# Altium PCB PCB2.PcbDoc
Units mm, origin at the board's own origin, x right, y up, seen from the top; angles counter-clockwise.
Board outline 51.21 x 49.89 mm, 2 copper layers (Top Layer, Bottom Layer); 29 components, 18 nets, 96 pads, 5 vias.
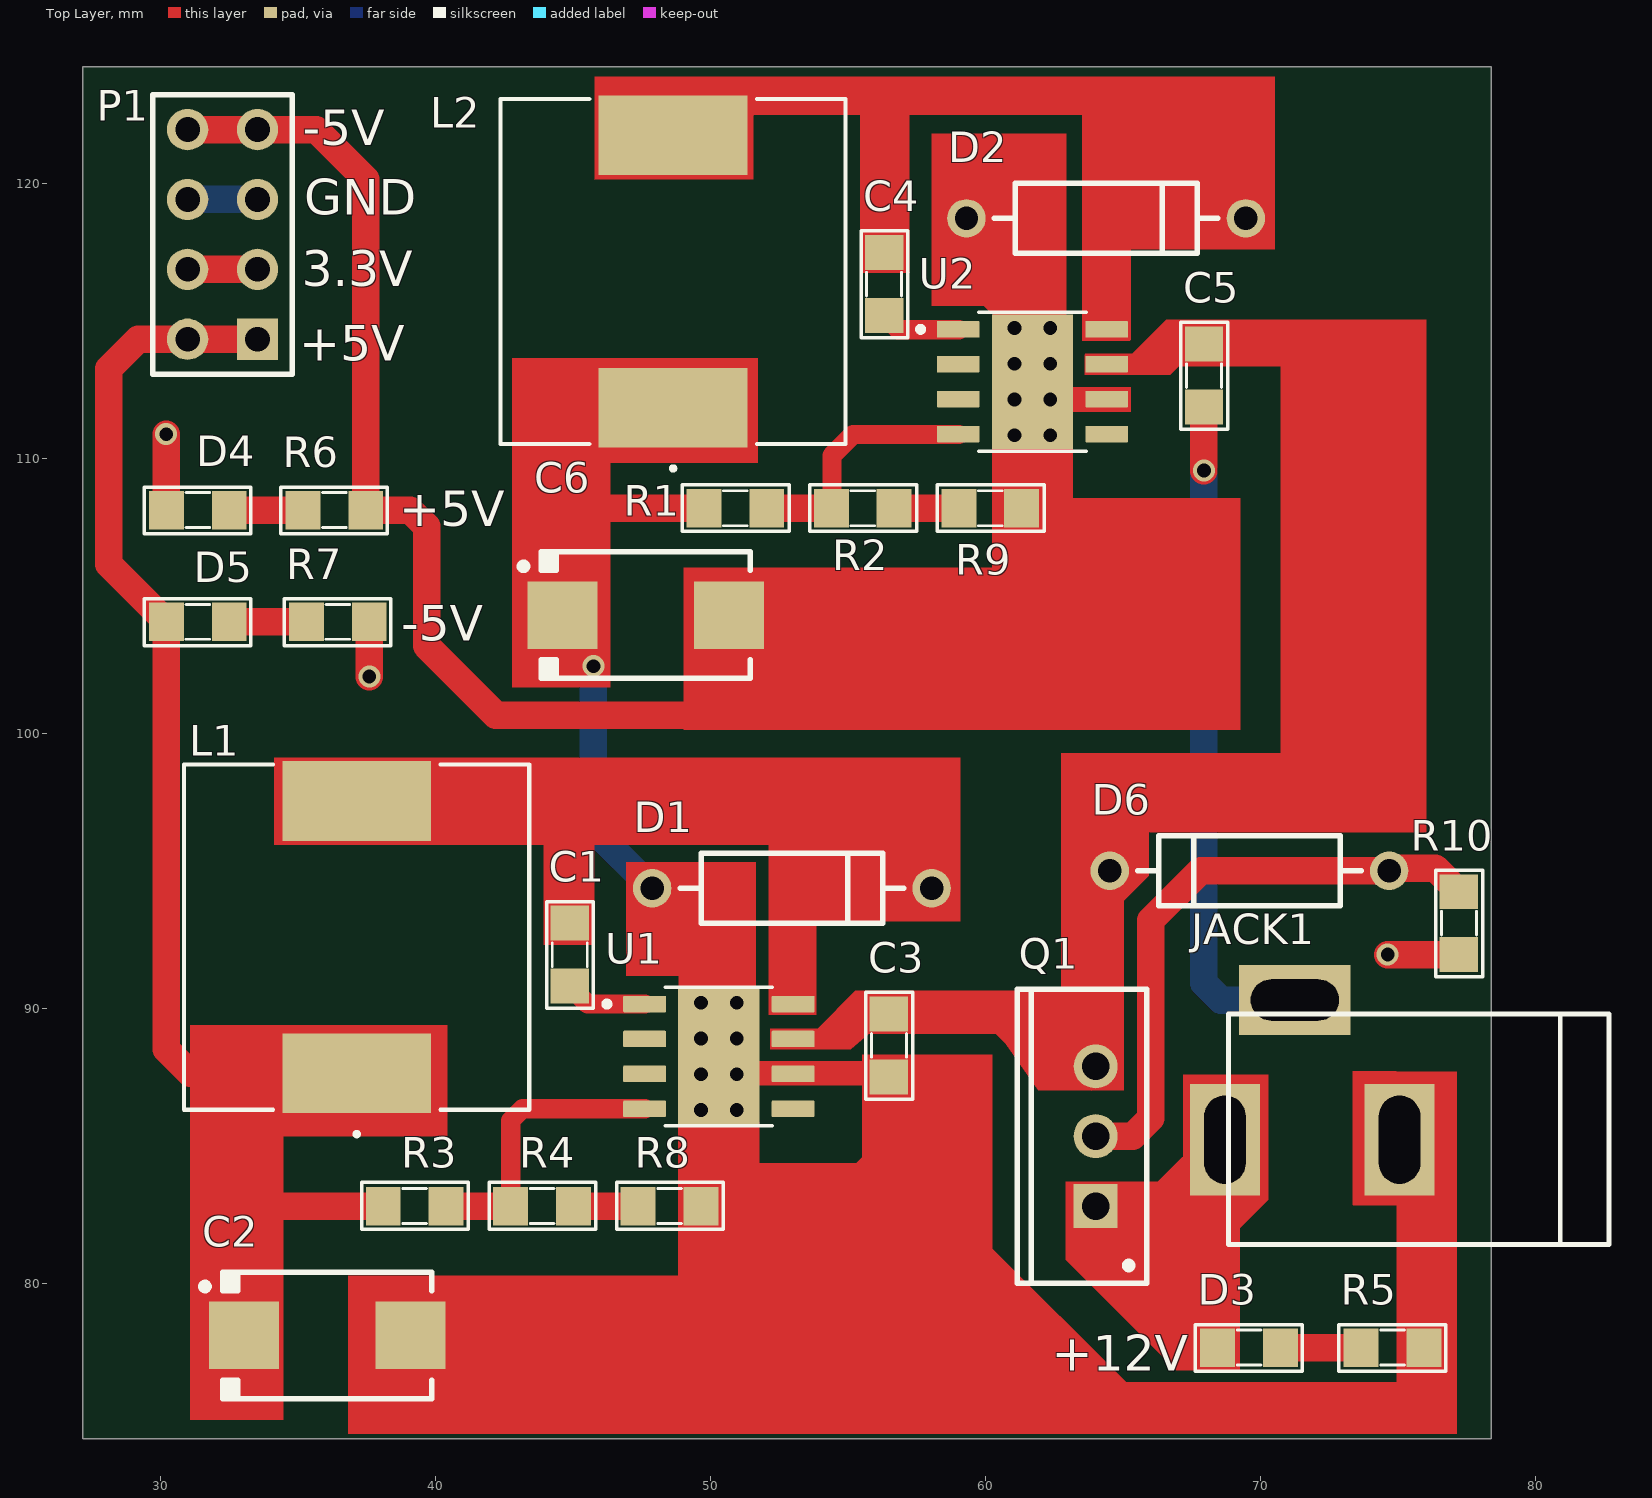
[diagram p0: Top Layer view]
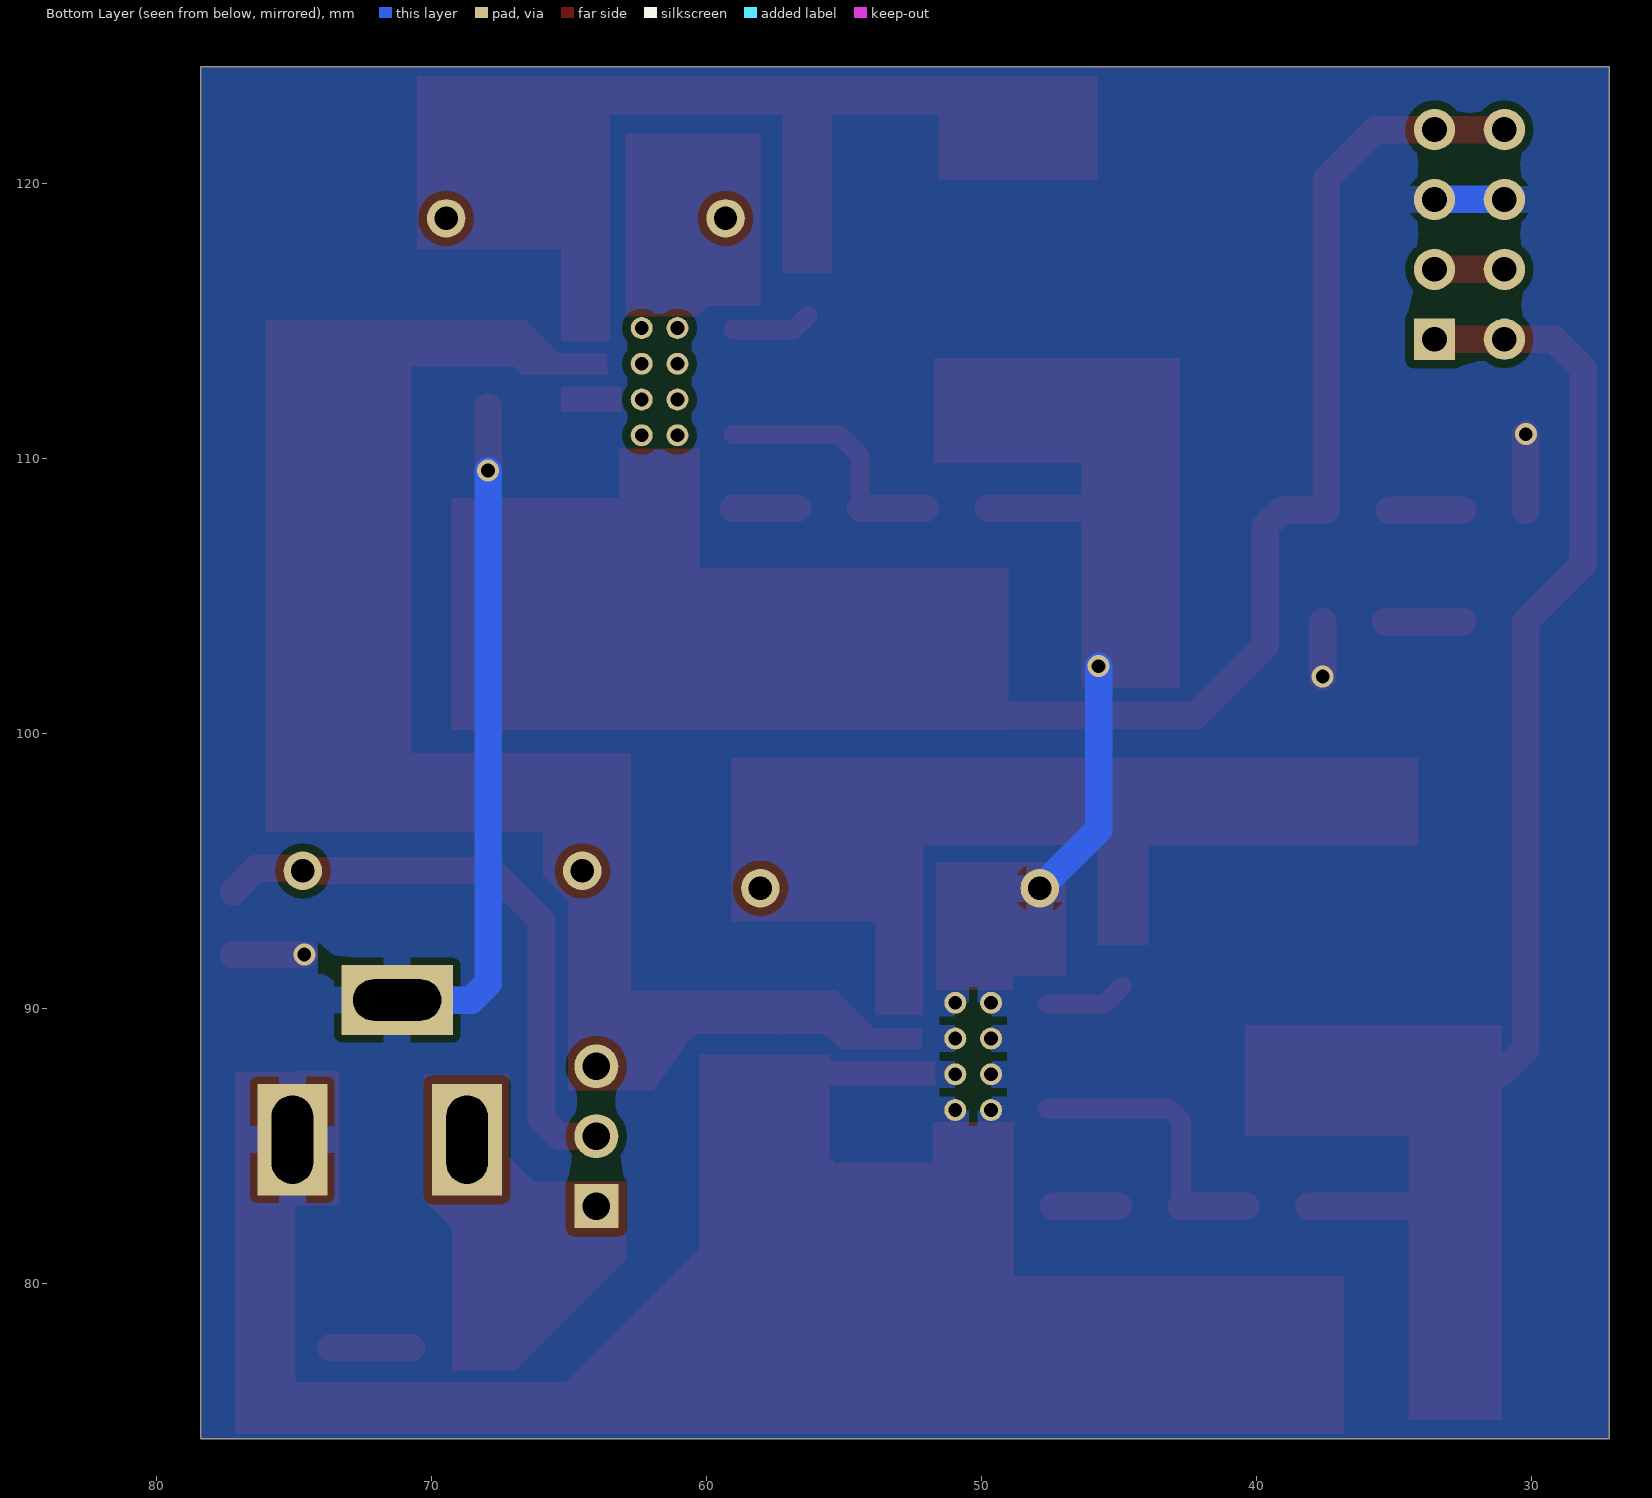
[diagram p1: Bottom Layer view, seen from below]
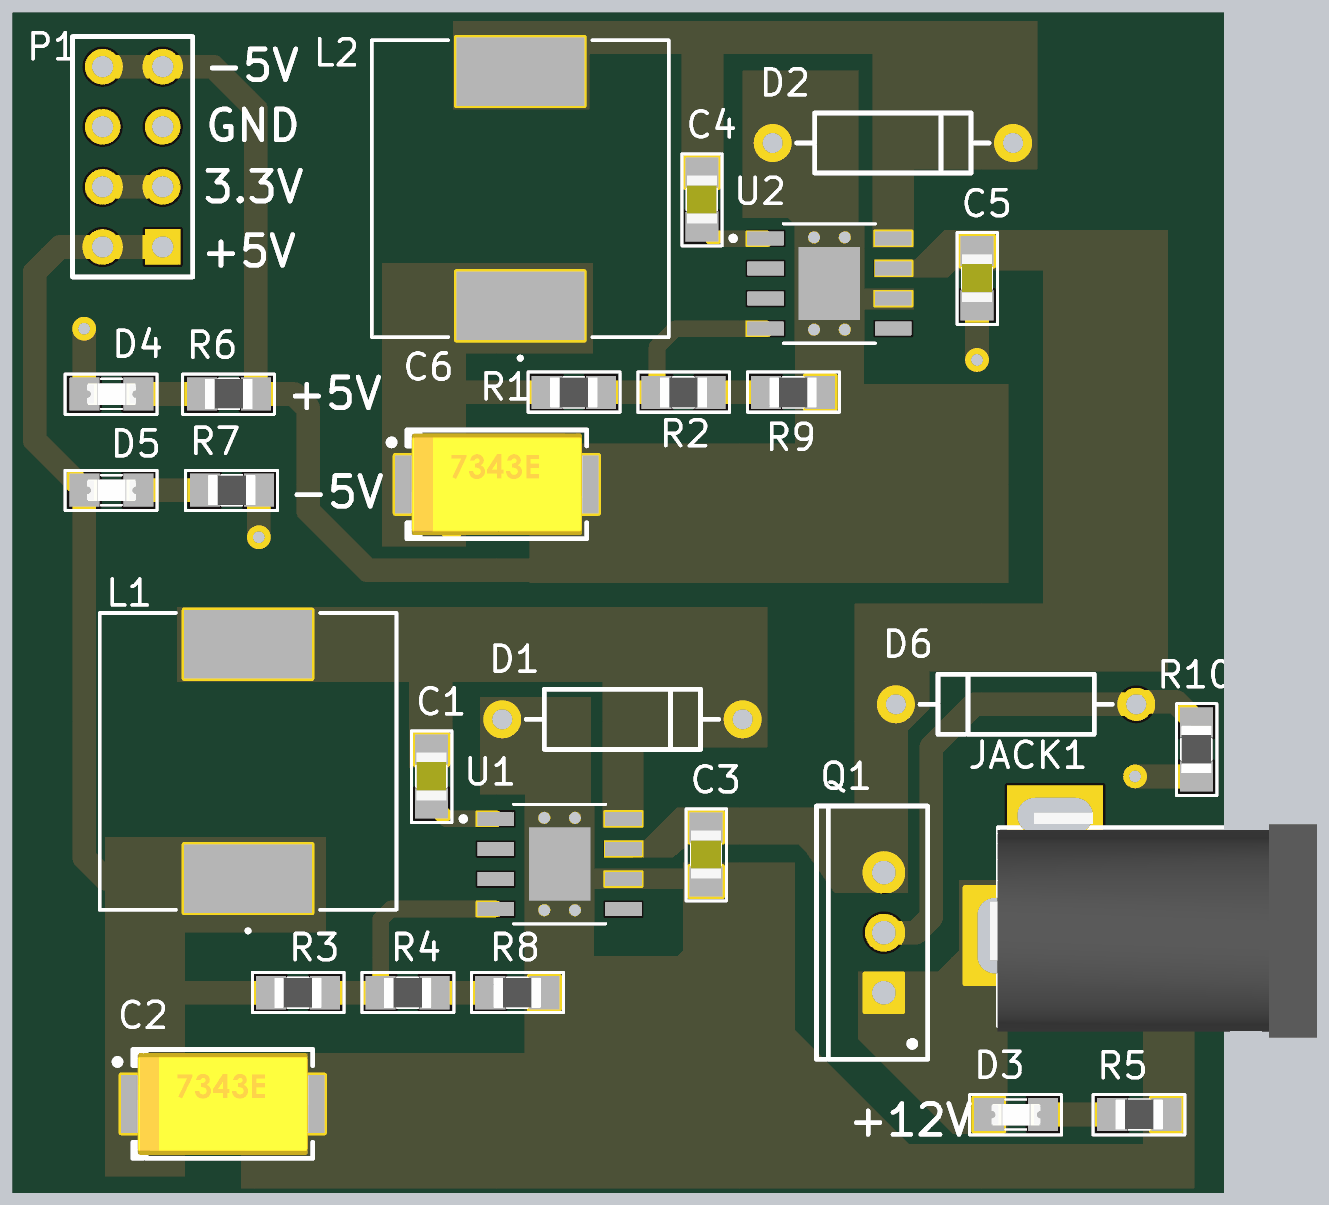
[diagram p2: 3D render of the assembled board from above, using the file's embedded part models]

## Layer stack, top to bottom
Top Solder: solder mask 0.0102, Solder Resist, Dk 3.5
Top Layer: signal copper 0.0356
Dielectric 1: dielectric 0.32, FR-4, Dk 4.8
Bottom Layer: signal copper 0.0356
Bottom Solder: solder mask 0.0102, Solder Resist, Dk 3.5

## Board outline
27.178,74.371 78.384,74.371 78.384,124.257 27.178,124.257

## Design rules (kind name [scope] priority, off if disabled: settings)
Clearance Clearance_1 [InNamedPolygon('GND_L02_P000')] p1: gap=0.4 ignorepadtopadclearanceinfootprint=FALSE
Clearance [All] p2: gap=0.3 ignorepadtopadclearanceinfootprint=FALSE
PolygonConnect PolygonConnect_1 [All vs IsNamedPolygon('GND_L02_P000')] p1: connectstyle=Relief reliefconductorwidth=1 reliefentries=4 polygonreliefangle="90 Angle" airgapwidth=0.254
PolygonConnect [All] p2: connectstyle=Relief reliefconductorwidth=1 reliefentries=4 polygonreliefangle="90 Angle" airgapwidth=0.254
RoutingVias [All] p1: holewidth=0.5 width=0.8 viastyle="Through Hole" minholewidth=0.5 minwidth=0.8 maxholewidth=0.5 maxwidth=0.8
SolderMaskExpansion [All] p1: expansion=0.102
Width [All] p1: maxlimit=1 minlimit=0.254 preferedwidth=0.7
30 further rules are at their usual default settings.

## Components (designator, comment, footprint, x,y, rotation, side; value= is the part's Value field where it differs from the comment)
C1 "0.01uF" "0805 CAP" 44.882,91.973 r90 top
C2 "220µF" "CAP POL 2917_7343" 36.068,78.13 r0 top
C3 "4.7 uF" "0805 CAP" 56.49,88.671 r90 top
C4 "0.01uF" "0805 CAP" 56.312,116.357 r90 top
C5 "4.7 uF" "0805 CAP" 67.945,113.03 r90 top
C6 "220µF" "CAP POL 2917_7343" 47.65,104.318 r0 top
D1 "SR5100" DIODE-0.4 52.959,94.386 r0 top
D2 "SR5100" DIODE-0.4 64.389,118.745 r0 top
D3 "LED" "LED SMD 0805" 69.596,77.749 r0 top
D4 "LED" "LED SMD 0805" 31.369,108.204 r0 top
D5 "LED" "LED SMD 0805" 31.369,104.14 r0 top
D6 "SR5100" DIODE-0.4 69.596,95.021 r180 top
JACK1 "JACK DC" "JACK DC" 71.882,87.782 r180 top value="Jac DC"
L1 "15uH CDRH127" IND_CDRH127/LDNP-470MC_SUM 37.135,92.608 r90 top
L2 "15uH CDRH127" IND_CDRH127/LDNP-470MC_SUM 48.641,116.815 r90 top
P1 "Header 4X2" HDR2X4 33.528,114.352 r90 top
Q1 "IRF9Z24N" TO-220AB 64.008,85.369 r90 top
R1 "10k" "0805 RESISTOR" 52.045,108.204 r180 top value="R1/4W - 1K"
R2 "3k" "0805 RESISTOR" 56.68,108.204 r180 top value="R1/4W - 1K"
R3 "10k" "0805 RESISTOR" 40.386,82.829 r180 top value="R1/4W - 1K"
R4 "3k" "0805 RESISTOR" 45.021,82.829 r180 top value="R1/4W - 1K"
R5 "10k" "0805 RESISTOR" 73.66,77.684 r0 top value="R1/4W - 1K"
R6 "10k" "0805 RESISTOR" 35.179,108.139 r0 top value="R1/4W - 1K"
R7 "10k" "0805 RESISTOR" 35.306,104.075 r0 top value="R1/4W - 1K"
R8 "240" "0805 RESISTOR" 49.657,82.829 r180 top value="R1/4W - 1K"
R9 "240" "0805 RESISTOR" 61.316,108.204 r180 top value="R1/4W - 1K"
R10 "100R" "0805 RESISTOR" 77.216,91.973 r90 top value="R1/4W - 1K"
U1 "TPS5430DDAR" CONV_TPS5430DDAR 50.302,88.271 r0 top
U2 "TPS5430DDAR" CONV_TPS5430DDAR 61.707,112.807 r0 top

## Footprints (in the part's own frame and the unit in brackets; to place one, negate y for a bottom-side part, rotate by r counter-clockwise, add the part's x,y. Pads: shape width x height; smd on the part's side, far side on the other; paste and mask are expansions set on the pad)
"0805 CAP" [mil] "Compoment SMD 80x50mil"
  rect 50x55 smd: 1(-45,0) 2(45,0)
  silkscreen extent -77,-34 76,33, body extent -40,-25 40,25, height 24
"0805 RESISTOR" [mil] "Compoment SMD 80x50mil"
  rect 50x55 smd: 1(0,0) 2(90,0)
  silkscreen extent -32,-34 121,33, body extent 6,-25 84,25, height 24
"CAP POL 2917_7343" [mm] "Molded Capacitor, 2-Leads, Body 7.30x4.30mm, IPC Medium Density"
  rect 2.55x2.45 smd: 1(-3.025,0) 2(3.025,0)
  silkscreen extent -4.57,-2.3 3.8,2.3, body extent -3.65,-2.15 3.65,2.15, height 4.1
CONV_TPS5430DDAR [mm]
  rrect10% 1.55x0.6 smd mask+0: 1(-2.7,1.905) 2(-2.7,0.635) 3(-2.7,-0.635) 4(-2.7,-1.905) 5(2.7,-1.905) 6(2.7,-0.635) 7(2.7,0.635) 8(2.7,1.905)
  round 0.8 hole 0.5 mask+0: 9(-0.65,-1.95) 9(-0.65,-0.65) 9(-0.65,0.65) 9(-0.65,1.95) 9(0.65,-1.95) 9(0.65,-0.65) 9(0.65,0.65) 9(0.65,1.95)
  rect 2.95x4.9 smd paste-3 mask+0: 9(0,0)
  silkscreen extent -4.17,-2.52 1.95,2.52
DIODE-0.4 [mm] "Diode, Thru-Hole; 2 Leads; 0.4 in Pin Spacing"
  round 1.4 hole 0.85: 1(-5.08,0) 2(5.08,0)
  silkscreen extent -4.06,-1.27 4.06,1.27
HDR2X4 [mm] "Connector; Header; 4x2 Position"
  rect 1.5x1.5 hole 0.9: 1(0,0)
  round 1.5 hole 0.9: 2(0,2.54) 3(2.54,0) 4(2.54,2.54) 5(5.08,0) 6(5.08,2.54) 7(7.62,0) 8(7.62,2.54)
  silkscreen extent -1.27,-1.27 8.89,3.81
IND_CDRH127/LDNP-470MC_SUM [mil]
  rect 114x213 smd: 1(-195,0) 2(195,0)
  silkscreen extent -285,-247 247,247
"JACK DC" [mm] "Jac DC input"
  rect 2.54x4.064 hole 1.5 slot 3.2 at 90 deg: 1(3.175,2.54) 2(-3.175,2.54)
  rect 4.064x2.54 hole 1.5 slot 3.2 at 0 deg: 3(0.635,-2.54)
  silkscreen extent -10.8,-2.03 3.05,6.35, body extent -10.42,-2.67 3.4,6.84, height 11.02
"LED SMD 0805" [mil] "Compoment SMD 80x50mil"
  rect 50x55 smd: 1(-45.39,-2.58) 2(44.61,-2.58)
  silkscreen extent -77,-37 76,30, body extent -41,-21 41,15, height 33
TO-220AB [mm] "TO, Thru-Hole, Vertical, Heatsink Mounted; 3 In-Line Leads; Pitch 2.54 mm"
  rect 1.6x1.6 hole 1: 1(-2.54,0)
  round 1.6 hole 1: 2(0,0) 3(2.54,0)
  silkscreen extent -5.35,-1.85 5.35,2.85, body extent -5.4,-1.9 5.4,2.9, height 19.3

## Part data
C1 C3 C4 C5: library part "CAP CERAMIC", LatestRevisionDate=17-Jul-2002, LatestRevisionNote="Re-released for DXP Platform.", PackageReference=RAD-0.3, Published=8-Jun-2000, Publisher="Altium Limited"
C2 C6: library part TPSE337M010R0040, "CAP TANT 330UF 20% 10V 2917", Capacitance=330µF, Device Package="2917 (7343 Metric)", ESR (Equivalent Series Resistance)=40mOhm, Manufacturer="AVX Corporation", Manufacturer Size Code=E, Operating Temperature="-55°C ~ 125°C", Supplier Part Number 1=478-9244-1-ND, Tolerance=±20%, Voltage - Rated=10V, ComponentLink1Description=Datasheet, ComponentLink1URL=http://datasheets.avx.com/TPS.pdf, ComponentLink2Description="DigiKey Link", ComponentLink2URL=http://digikey.com/product-detail/en/avx-corporation/TPSE337M010R0040/478-9244-1-ND/4562109, Features="General Purpose", Height - Seated (Max)="0.169\" (4.30mm)", LastUpdated="9/2/2020 1:16:10 AM", Lifecycle Status=Active, Minimum Order=1, Mounting Type="Surface Mount", Package / Case="2917 (7343 Metric)", Packaging=TapeAndReel, PartId=3489, Part Number=TPSE337M010R0040, Part Status=Active, Price=1.73, Series=TPS, Size / Dimension="0.287\" L x 0.169\" W (7.30mm x 4.30mm)", Supplier 1=DigiKey, Type=Molded
D1 D2 D6: library part "D Zener", "Zener Diode", LatestRevisionDate=17-Jul-2002, LatestRevisionNote="Re-released for DXP Platform.", PackageDescription="Diode, Thru-Hole; 2 Leads; 0.7 in Pin Spacing", PackageReference=DIODE-0.7, Published=8-Jun-2000, Publisher="Altium Limited"
L1 L2: library part CDRH127/LDNP-470MC, "47µH Shielded Inductor 3.25A 78mOhm Max Nonstandard", Package="Nonstandard Sumida", Check_prices=https://www.snapeda.com/parts/CDRH127/LDNP-470MC/Sumida%20America%20Components%20Inc./view-part/547921/?ref=eda, Digi-Key_Part_Number=308-1339-1-ND, MF="Sumida America", MP=CDRH127/LDNP-470MC, Purchase-URL=https://pricing.snapeda.com/search/part/CDRH127/LDNP-470MC/?ref=eda, SnapEDA_Link=https://www.snapeda.com/parts/CDRH127/LDNP-470MC/Sumida%20America%20Components%20Inc./view-part/547921/?ref=snap
Q1: library part MOSFET-P, "P-Channel MOSFET", LatestRevisionDate=17-Jul-2002, LatestRevisionNote="Re-released for DXP Platform.", PackageDescription="TO, Flat Index; 3 In-Line, Axial Leads; Body Dia. 4.6mm; Lead Dia. 0.5 mm (max)", PackageReference=E3, PackageVersion=1995/1996, Published=8-Jun-2000, Publisher="Altium Limited"
R1 R2 R3 R4 R5 R6 R7 R8 R9 R10: library part RESISTOR
U1 U2: "5.5V to 36V Input, 3A, 500kHz Step-Down Converter 8-SO PowerPAD -40 to 125", Package="HSOIC-8 Texas Instruments", Arrow_Electronics-Purchase-URL=https://snapeda.com/shop?store=Arrow+Electronics&id=423058, Digi-Key_Part_Number=296-26988-1-ND, DigiKey-Purchase-URL=https://snapeda.com/shop?store=DigiKey&id=423058, MF="Texas Instruments", Mouser-Purchase-URL=https://snapeda.com/shop?store=Mouser&id=423058, MP=TPS5430DDAR, SnapEDA_Link=https://www.snapeda.com/parts/TPS5430DDAR/Texas%20Instruments/view-part/423058/?ref=snap, Texas_Instruments-Purchase-URL=https://snapeda.com/shop?store=Texas+Instruments&id=423058
P1: LatestRevisionDate=17-Jul-2002, LatestRevisionNote="Re-released for DXP Platform.", Publisher="Altium Limited"

## Via types
v1: diameter 0.8, hole 0.5, Top Layer to Bottom Layer, 5 vias

## Nets (pads, with @x,y where several pads share a name; then routed paths per layer and width w, separated by ;. In a path a pad name is that pad's centre, name@x,y a point inside that pad or via, vN(x,y) a via of type N, cw(c..) or ccw(c..) an arc to the next point about the centre after c; other vN are vias at no path point)
3.3V: P1.3 P1.4 | length 2.5
  Top Layer w1: P1.4 P1.3
"12V IN": D3.1 JACK1.1 Q1.1
+5V: C2.1 D5.1 L1.1 P1.1 P1.2 R3.2 | length 43.1
  Top Layer w1: P1.1 P1.2 29.186,114.352 28.118,113.284 28.118,106.173 D5.1 30.216,88.529 31.09,87.655 L1.1 ; 33.807,82.829 R3.2
-5V: C6.2 D2.1 P1.7 P1.8 R6.2 R9.1 U2.6 U2.9 | length 36.6
  Top Layer w1: P1.8 P1.7 35.66,121.972 37.465,120.167 R6.2 39.08,108.139 39.675,107.544 39.675,103.2 42.189,100.686 49.174,100.686
GND: C2.2 C3.1 C5.1 C6.1 D1.1 D4.1 JACK1.2 JACK1.3 L2.1 P1.5 P1.6 R1.2 R5.2 R7.2 R8.1 R10.1 U1.6 U1.9 | length 47.7
  Top Layer w1: v1(30.206,110.896) 30.216,110.886 D4.1 ; v1(37.592,102.083) R7.2 ; C6.1@44.382,104.075 C6.1 ; 45.822,108.204 R1.2 ; v1(67.945,109.576) C5.1 ; v1(74.625,91.973) R10.1 ; JACK1.2@75.006,85.192 JACK1.2
  Bottom Layer w1: P1.6 P1.5 ; v1(45.745,102.464) 45.745,96.52 D1.1 ; v1(67.945,109.576) 67.945,90.932 68.555,90.322 JACK1.3
NetC1_1: C1.1 U1.1 | length 3
  Top Layer w0.7: C1.1 45.532,90.18 U1.1@47.607,90.18
NetC1_2: C1.2 D1.2 L1.2 U1.8
NetC4_1: C4.1 U2.1 | length 2.9
  Top Layer w0.7: C4.1 56.83,114.696 U2.1@59.037,114.696
NetC4_2: C4.2 D2.2 L2.2 U2.8
NetD3_2: D3.2 R5.1 | length 2.9
  Top Layer w1: D3.2 R5.1
NetD4_2: D4.2 R6.1 | length 2.7
  Top Layer w1: D4.2 R6.1
NetD5_2: D5.2 R7.1 | length 2.8
  Top Layer w1: D5.2 R7.1
NetD6_1: D6.1 Q1.2 R10.2 | length 21.8
  Top Layer w1: Q1.2 65.354,85.369 66.015,86.03 66.015,93.218 67.818,95.021 D6.1 74.778,95.123 76.352,95.123 R10.2
NetR1_1: R1.1 R2.2 U2.4 | length 9.2
  Top Layer w0.7: R2.2@54.419,108.204 54.419,110.122 55.184,110.886 U2.4@59.037,110.886
  Top Layer w1: R1.1 R2.2
NetR2_1: R2.1 R9.2 | length 2.3
  Top Layer w1: R2.1 R9.2
NetR3_1: R3.1 R4.2 U1.4 | length 10.5
  Top Layer w0.7: R4.2 42.735,85.941 43.165,86.37 U1.4@47.607,86.37
  Top Layer w1: R3.1 R4.2
NetR4_1: R4.1 R8.2 | length 2.3
  Top Layer w1: R4.1 R8.2
Vin: C3.2 C5.2 D6.2 Q1.3 U1.7 U2.7
pads on no net: U1.2 U1.3 U1.5 U2.2 U2.3 U2.5

## Polygon pours and split planes (outlines as drawn)
GND on Bottom Layer "GND_L02_P002" (solid, remove dead copper, pour order 2): 78.359,124.231 27.178,124.231 27.178,74.371 78.308,74.371 78.359,74.32

## Other copper
Top Layer:
  region net -5V: 63.119,108.56 69.266,108.56 69.266,100.152 63.119,100.152
  region net GND: 51.689,88.087 55.55,88.087 55.55,87.224 51.689,87.224
  region net -5V: 65.278,112.598 65.278,111.709 63.094,111.709 63.094,112.598
  region net -5V: 59.309,118.745 59.309,115.57 59.944,115.57 60.325,115.189 62.941,115.189 62.941,118.745
  region net -5V: 62.941,116.688 62.941,121.818 58.039,121.818 58.039,115.57 61.6,115.57
  region net -5V: 60.249,110.363 60.249,106.045 63.17,106.045 63.17,110.363
  region net -5V: 60.325,106.045 49.022,106.045 49.022,100.152 63.119,100.152 63.119,106.045
  region net GND: 51.714,113.665 42.799,113.665 42.799,101.702 46.355,101.702 46.355,109.855 51.714,109.855
  region net GND: 48.819,85.877 48.819,80.289 36.83,80.289 36.83,74.549 51.765,74.549 51.765,85.877
  region net +5V: 40.437,85.369 40.437,89.408 31.09,89.408 31.09,75.057 34.468,75.057 34.468,85.369
  region net GND: 51.765,84.379 55.296,84.379 55.524,84.607 55.524,88.341 60.249,88.341 60.249,74.549 51.765,74.549
  region net GND: 57.836,76.429 74.955,76.429 74.955,87.706 77.14,87.706 77.14,74.549 57.836,74.549
  region net GND: 48.844,90.703 48.844,91.211 46.939,91.211 46.939,95.326 51.638,95.326 51.638,90.703
  region net NetC4_2: 57.252,116.764 57.226,116.789 57.226,122.58 55.448,122.58 55.448,116.764
  region net NetC1_2: 34.138,95.961 34.138,99.136 59.08,99.136 59.08,93.193 53.848,93.193 53.848,89.789 52.121,89.789 52.121,95.961 40.259,95.961
  region net NetC4_2: 65.253,114.3 65.278,114.325 65.278,117.627 70.51,117.627 70.51,123.901 45.796,123.901 45.796,120.142 45.822,120.167 51.562,120.167 51.562,122.479 51.587,122.504 63.525,122.504 63.525,114.3
  region net NetC1_2: 45.771,92.329 45.771,96.114 45.695,96.19 43.942,96.19 43.942,92.329
  region net GND: 74.955,87.706 74.93,87.732 73.355,87.732 73.355,82.88 73.381,82.855 75.006,82.855
  region net Vin: 63.602,113.055 63.602,113.792 63.627,113.817 65.329,113.817 66.573,115.062 68.91,115.062 68.91,113.361 67.03,113.359 66.726,113.055
  region net Vin: 52.172,88.541 52.172,89.281 53.899,89.281 55.27,90.653 57.404,90.653 57.404,89.052 57.353,89.103 55.753,89.103 55.093,88.541
  region net Vin: 63.983,87.046 61.925,87.046 60.744,88.735 60.376,89.103 57.353,89.103 57.404,89.154 57.404,90.653 65.075,90.653 65.024,90.602 65.024,87.046 63.881,87.046 63.856,87.02
  region net Vin: 62.789,90.602 62.763,90.627 62.763,99.289 65.938,99.289 65.938,99.263 65.938,94.844 65.024,93.929 65.024,90.602
  region net Vin: 68.907,115.062 76.022,115.062 76.022,96.418 70.739,96.418 70.739,113.36 68.907,113.36
  region net Vin: 65.938,99.289 72.009,99.289 72.034,99.263 72.034,96.418 65.964,96.418 65.938,96.444
  region net "12V IN": 69.24,76.86 69.24,82.017 70.282,83.058 70.282,87.605 67.234,87.605 67.183,87.605 67.183,84.607 67.158,84.607 66.269,83.718 62.916,83.718 62.916,80.874 66.929,76.86 67.64,76.86
  region net GND: 60.173,81.356 65.202,76.327 60.173,76.327

## Silkscreen, mask and mechanical layers (free items; w line width, h text height)
Top Overlay:
  text "-5V" at 35.179,121.412 h1.3
  text "GND" at 35.23,118.872 h1.3
  text "3.3V" at 35.128,116.281 h1.3
  text "+5V" at 35.052,113.563 h1.3
  text "+5V" at 38.684,107.544 h1.3
  text "-5V" at 38.76,103.378 h1.3
  text "+12V" at 62.408,76.835 h1.3